# Altium PCB ADSTM32-PCB.PcbDoc
Units mm, origin at the board's own origin, x right, y up, seen from the top; angles counter-clockwise.
Board outline 38.99 x 25.31 mm, 2 copper layers (Top Layer, Bottom Layer), stack 1.671 mm thick; 30 components, 26 nets, 139 pads, 113 vias.
Unrouted connection lines stored in the file: 6.
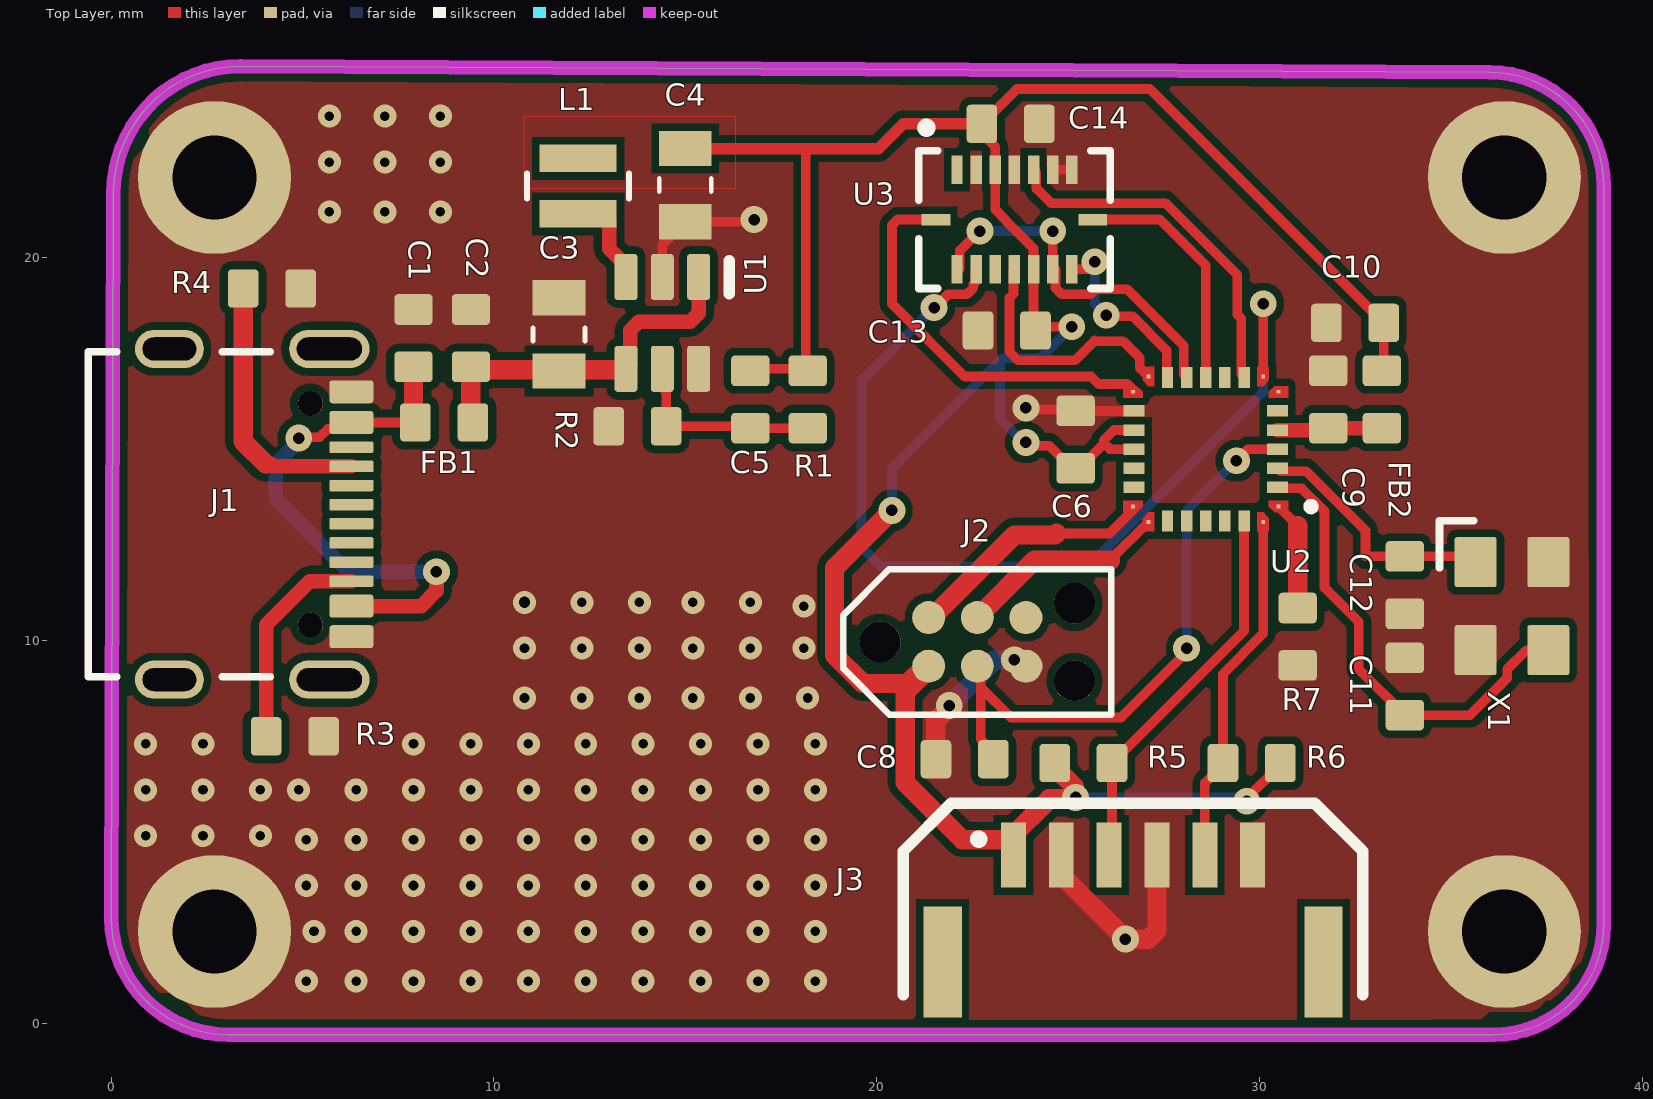
[diagram p0: Top Layer view]
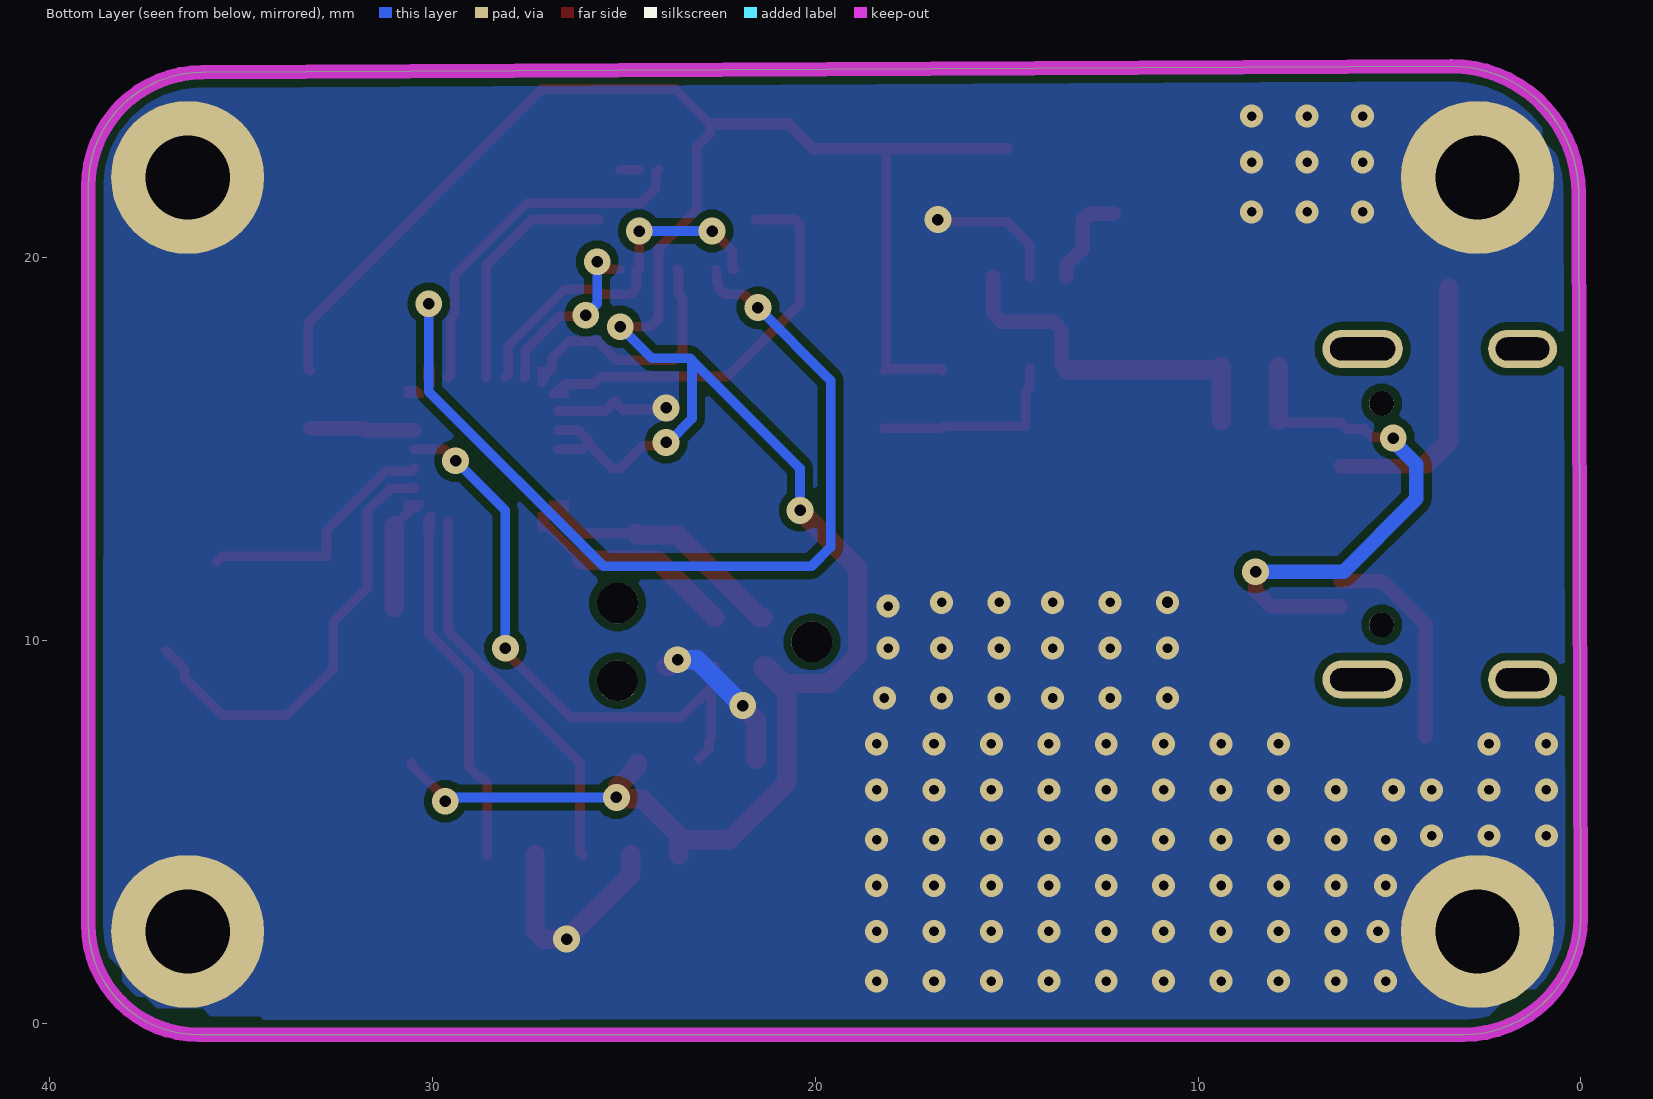
[diagram p1: Bottom Layer view, seen from below]
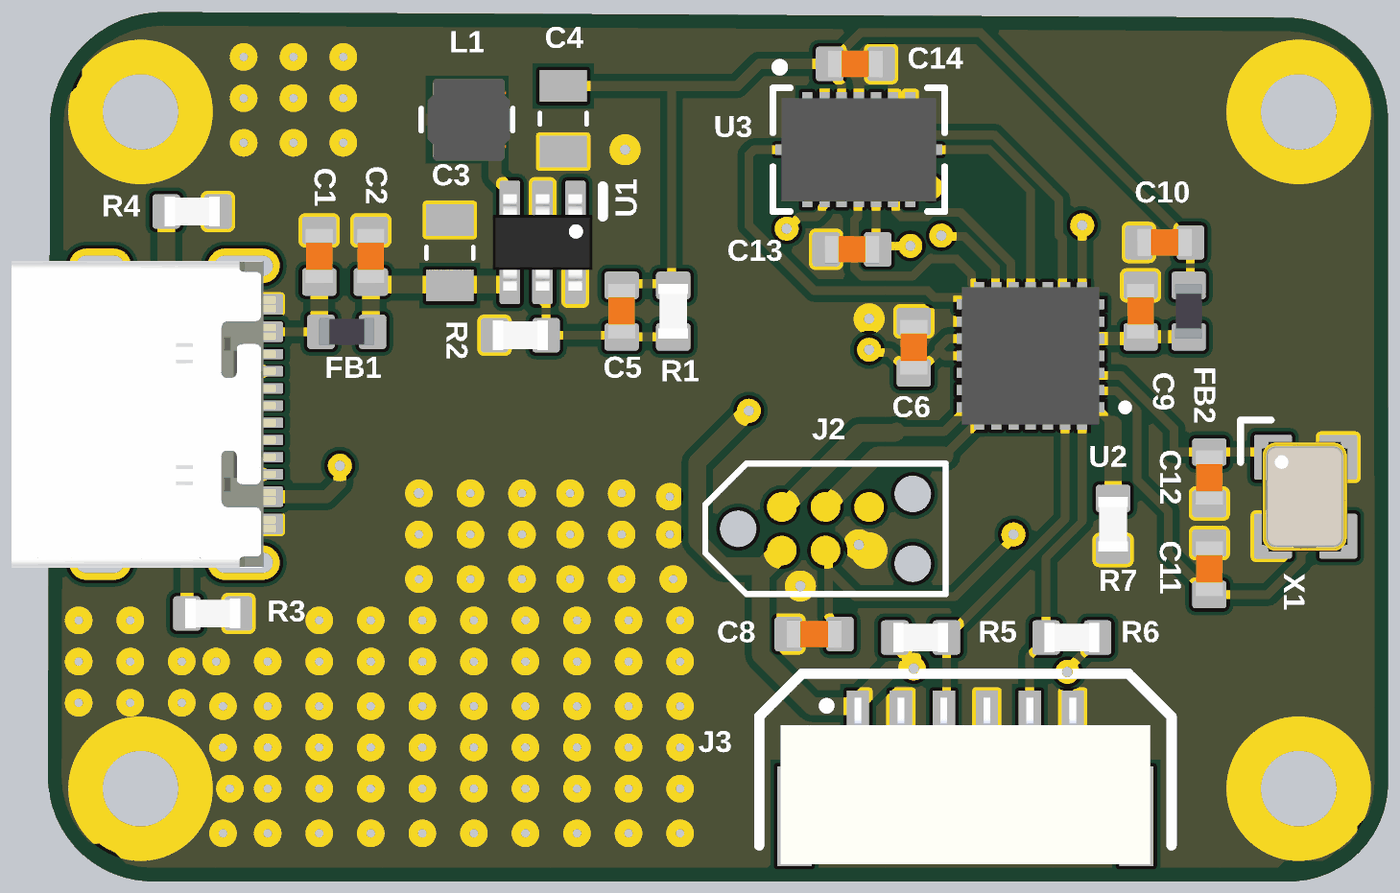
[diagram p2: 3D render of the assembled board from above, using the file's embedded part models]

## Layer stack, top to bottom
Top Solder: solder mask 0.0102, Solder Resist, Dk 3.5
Top Layer: signal copper 0.0356
Dielectric 1: dielectric 1.6, FR-4, Dk 4.6
Bottom Layer: signal copper 0.0356
Bottom Solder: solder mask 0.0102, Solder Resist, Dk 3.5

## Board outline
0.005,2.762 ccw(c3.066,2.762) 3.066,-0.298 26.7,-0.3 36.117,-0.3 ccw(c36.117,2.583) 39,2.583 38.997,21.868 ccw(c36.019,21.868) 36.019,24.846 3.384,25.007 ccw(c3.384,21.682) 0.059,21.682

## Design rules (kind name [scope] priority, off if disabled: settings)
Clearance [All] p1: gap=0.2 ignorepadtopadclearanceinfootprint=FALSE except(0: Arc-Hole Track-Hole SMDPad-Hole THPad-Hole Via-Hole Fill-Hole Poly-Hole Region-Hole Text-Hole; 0.15: Arc-Arc Arc-Track Arc-SMDPad Track-Track Track-SMDPad SMDPad-SMDPad SMDPad-THPad; 0.3: Arc-THPad Track-THPad THPad-THPad)
PolygonConnect [All] p1: connectstyle=Direct reliefconductorwidth=0.254 reliefentries=4 polygonreliefangle="90 Angle" airgapwidth=0.254
RoutingVias [All] p1: holewidth=0.3 width=0.7 viastyle="Through Hole" minholewidth=0.25 minwidth=0.6 maxholewidth=0.3 maxwidth=0.7
SolderMaskExpansion [All] p1: expansion=0.102 istentingtop=FALSE
UnRoutedNet [All] p1: checkbadconnections=TRUE
Width [All] p1: maxlimit=1 minlimit=0.15 preferedwidth=0.3
29 further rules are at their usual default settings.

## Classes and differential pairs
component class U_3_ADSTM32-Peripheral: C13 C14 J3 U3
component class U_2_ADSTM32-MCU: C6 C8 C9 C10 C11 C12 FB2 J2 R5 R6 R7 U2 X1
component class U_1_ADSTM32-Power: C1 C2 C3 C4 C5 FB1 J1 L1 R1 R2 R3 R4 U1

## Components (designator, comment, footprint, x,y, rotation, side; value= is the part's Value field where it differs from the comment)
C1 "100nF" CAP_0603 7.9,17.9 r270 top
C2 "100nF" CAP_0603 9.4,17.9 r270 top
C3 "4u7" C2012X7R1C475K125AE 11.7,18 r90 top
C4 "4u7" C2012X7R1C475K125AE 15,21.9 r270 top
C5 "22pF" CAP_0603 16.7,16.3 r90 top
C6 "100nF" CAP_0603 25.2,15.25 r270 top
C8 "100nF" CAP_0603 22.3,6.9 r180 top
C9 "100nF" CAP_0603 31.8,16.3 r270 top
C10 "100nF" CAP_0603 32.5,18.3 r0 top
C11 "10pF" CAP_0603 33.8,8.8 r270 top
C12 "10pF" CAP_0603 33.8,11.45 r90 top
C13 "100nF" CAP_0603 23.4,18.1 r0 top
C14 "100nF" CAP_0603 23.5,23.5 r180 top
FB1 "120R" FB_0603 8.7,15.7 r0 top
FB2 "120R" FB_0603 33.2,16.3 r90 top
J1 "USB4105-GF-A-060" USB4105-GF-A-060 3.9,13.3 r270 top
J2 "TC2030-NL" TC2030-NL-FP 22.63,9.965 r0 top
J3 "SM06B-GHS-TB" SM06B-GHS-TB 26.7,3 r0 top
L1 "NRH2412T100MNGH" NRH2412T100MNGH 12.2,21.875 r270 top
R1 "887k" RES_0603 18.2,16.3 r90 top
R2 "280k" RES_0603 13.75,15.6 r0 top
R3 "5k1" RES_0603 4.8,7.5 r180 top
R4 "5k1" RES_0603 4.2,19.2 r180 top
R5 "5k1" RES_0603 25.4,6.8 r180 top
R6 "5k1" RES_0603 29.8,6.8 r0 top
R7 "5k1" RES_0603 31,10.1 r90 top
U1 "LTC3405ES6#TRMPBF" SOT-23-6 14.4,18.3 r180 top
U2 "STM32F042G6U6" STM32F042G6U6 28.6,15 r180 top
U3 "BMI088" BMI088 23.6,21 r0 top
X1 "24MHz" XTAL_3225 36.6,10.9 r270 top

## Footprints (in the part's own frame and the unit in brackets; to place one, negate y for a bottom-side part, rotate by r counter-clockwise, add the part's x,y. Pads: shape width x height; smd on the part's side, far side on the other; paste and mask are expansions set on the pad)
BMI088 [mm]
  rect 0.3x0.75 smd: 1(-1.5,1.3) 2(-1,1.3) 3(-0.5,1.3) 4(0,1.3) 5(0.5,1.3) 6(1,1.3) 7(1.5,1.3) 9(1.5,-1.3) 10(1,-1.3) 11(0.5,-1.3) 12(0,-1.3) 13(-0.5,-1.3) 14(-1,-1.3) 15(-1.5,-1.3)
  rect 0.75x0.3 smd: 8(2.05,0) 16(-2.05,0)
  silkscreen extent -2.5,-1.8 2.5,2.51, body extent -2.25,-1.5 2.25,1.5, height 1.01
C2012X7R1C475K125AE [mm]
  rect 0.92x1.38 smd: 1(-0.955,0) 2(0.955,0)
  silkscreen extent -0.17,-0.68 0.17,0.68
CAP_0603 [mm]
  rrect25% 0.8x1 smd: 1(-0.75,0) 2(0.75,0)
  body extent -0.8,-0.4 0.8,0.4, height 0.51
FB_0603 [mm]
  rrect25% 0.8x1 smd: 1(-0.75,0) 2(0.75,0)
  body extent -0.8,-0.4 0.8,0.4, height 0.81
NRH2412T100MNGH [mil]
  rect 28x79 smd paste+0 mask+0: 1(-28.54,0) 2(28.54,0)
  silkscreen extent -13,-52 13,52, body extent -47,-45 47,49, height 47
RES_0603 [mm]
  rrect25% 0.8x1 smd: 1(-0.75,0) 2(0.75,0)
  body extent -0.8,-0.43 0.8,0.43, height 0.52
SM06B-GHS-TB [mm]
  rect 0.65x1.7 smd: 1(-3.125,1.4) 2(-1.875,1.4) 3(-0.625,1.4) 4(0.625,1.4) 5(1.875,1.4) 6(3.125,1.4)
  rect 1x2.9 smd: ""(-4.975,-1.4) ""(4.975,-1.4)
  silkscreen extent -6,-2.25 6,2.75, body extent -5.38,-2.8 5.38,2.05, height 4.26
SOT-23-6 [mm]
  rrect25% 0.6x1.2 smd: 1(-0.95,-1.2) 2(0,-1.2) 3(0.95,-1.2) 4(0.95,1.2) 5(0,1.2) 6(-0.95,1.2)
  silkscreen extent -1.75,-1.63 -1.75,-0.76, body extent -1.45,-1.4 1.45,1.4, height 1.45
STM32F042G6U6 [mm]
  rect 0.1x0.1 smd paste-1 mask+0: 1(-1.9,1.5) 7(-1.9,-1.5) 8(-1.5,-1.9) 14(1.5,-1.9) 15(1.9,-1.5) 21(1.9,1.5) 22(1.5,1.9) 28(-1.5,1.9)
  rect 0.55x0.3 smd: 2(-1.875,1) 3(-1.875,0.5) 4(-1.875,0) 5(-1.875,-0.5) 6(-1.875,-1) 16(1.875,-1) 17(1.875,-0.5) 18(1.875,0) 19(1.875,0.5) 20(1.875,1)
  rect 0.3x0.55 smd: 9(-1,-1.875) 10(-0.5,-1.875) 11(0,-1.875) 12(0.5,-1.875) 13(1,-1.875) 23(1,1.875) 24(0.5,1.875) 25(0,1.875) 26(-0.5,1.875) 27(-1,1.875)
  Top Layer region: -1.35,1.65 -1.5,1.65 -1.65,1.8 -1.65,2.15 -1.35,2.15
  Top Layer region: 1.65,1.8 1.5,1.65 1.35,1.65 1.35,2.15 1.65,2.15
  Top Layer region: 2.15,1.35 1.65,1.35 1.65,1.5 1.8,1.65 2.15,1.65
  Top Layer region: 2.15,-1.65 1.8,-1.65 1.65,-1.5 1.65,-1.35 2.15,-1.35
  Top Layer region: 1.65,-1.8 1.65,-2.15 1.35,-2.15 1.35,-1.65 1.5,-1.65
  Top Layer region: -1.35,-2.15 -1.65,-2.15 -1.65,-1.8 -1.5,-1.65 -1.35,-1.65
  Top Layer region: -1.65,-1.5 -1.8,-1.65 -2.15,-1.65 -2.15,-1.35 -1.65,-1.35
  Top Layer region: -1.65,1.5 -1.65,1.35 -2.15,1.35 -2.15,1.65 -1.8,1.65
  silkscreen extent -2.85,1.4 -2.65,1.6, body extent -2,-2 2,2, height 0.6
TC2030-NL-FP [mil]
  round 33.98 smd paste-16.99: 1(-50,-25) 2(-50,25) 3(0,-25) 4(0,25) 5(50,-25) 6(50,25)
  round 42.01 hole 42.01 unplated: MH(-100,0) MH(100,-40) MH(100,40)
  silkscreen extent -138,-75 138,75
USB4105-GF-A-060 [mm]
  rrect25% 0.6x1.15 smd mask+0.05: A1B12(-3.2,2.378) A4B9(-2.4,2.378) B1A12(3.2,2.378) B4A9(2.4,2.378)
  rrect25% 0.3x1.15 smd mask+0.05: A5(-1.25,2.378) A6(-0.25,2.378) A7(0.25,2.378) A8(1.25,2.378) B5(1.75,2.378) B6(0.75,2.378) B7(-0.75,2.378) B8(-1.75,2.378)
  round 0.65 hole 0.65 unplated mask+0.05: MH(-2.89,1.303) MH(2.89,1.303)
  oval 1x2.1 hole 0.6 slot 1.7 at 90 deg: SH(-4.32,1.803) SH(4.32,1.803)
  oval 1x1.8 hole 0.6 slot 1.4 at 90 deg: SH(-4.32,-2.377) SH(4.32,-2.377)
  silkscreen extent -4.25,-4.5 4.25,0.25, body extent -4.47,-4.97 4.47,2.73, height 3.27
XTAL_3225 [mm]
  rrect10% 1.3x1.1 smd: 1(-1.15,-0.95) 2(1.15,-0.95) 3(1.15,0.95) 4(-1.15,0.95)
  silkscreen extent -2.23,-1.89 -1,-1, body extent -1.6,-1.28 1.6,1.22, height 0.61

## Part data
C1 C2 C5 C6 C8 C9 C10 C11 C12 C13 C14: library part CAP_0603, "Capacitor SMD 0603"
C3 C4: library part CAP_0805_16V, "Multilayer Ceramic Capacitors MLCC - SMD/SMT 0805 16VDC 4.7uF 10% X7R 1.25mm", Manufacturer=TDK, Manufacturer Part Number=C2012X7R1C475K125AE
FB1 FB2: library part FB_0603, "Ferrite Bead SMD 0603"
J1: "USB Connector Type C SMT 12 Pin", Manufacturer=GCT, Distributor Link=https://eu.mouser.com/ProductDetail/GCT/USB4105-GF-A-060?qs=QNEnbhJQKvY2mocwNJzgfA%3D%3D, Manufacturer Part Number=USB4105-GF-A-060
J2: "Tag-Connect No-Solder SWD Debug Connector (No Legs) DO NOT PLACE", Manufacturer=Tag-Connect, Manufacturer Part Number=TC2030-NL-FP
J3: "Header Connector 6 Position 1.25MM Pitch SMD Horizontal JST GH", Manufacturer=JST, Manufacturer Part Number=SM06B-GHS-TB
L1: "Power Inductors - SMD 963-LSXNE2424MKT100M RPLCMT PN 2412 10uH 600mOhms", Manufacturer="TAIYO YUDEN", Manufacturer Part Number=NRH2412T100MNGH
R1 R2 R3 R4 R5 R6 R7: library part RES_0603, "Resistor SMD 0603"
U1: "Switching Voltage Regulators 1.5MHz, 300mA Sync Buck Reg in SOT", Manufacturer="Analog Devices", Manufacturer Part Number=LTC3405ES6#TRMPBF
U2: "ARM® Cortex®-M0 STM32F0 Microcontroller IC 32-Bit Single-Core 48MHz 32KB (32K x 8) FLASH 28-UFQFPN (4x4)", Manufacturer=STMicroelectronics, Manufacturer Part Number=STM32F042G6U6
U3: "Inertial Measurement Unit IMU 6-Axis LGA", Manufacturer=Bosch, Manufacturer Part Number=BMI088
X1: library part TSX-3225_24.0000MF15X-AC, "Crystal SMD 24MHz 10PPM 7pF 3225", Manufacturer=Epson, Manufacturer Part Number="TSX-3225 24.0000MF15X-AC"

## Free pads (board coordinates)
  round 4 hole 2.2: MH(2.7,2.4) MH(2.7,22.1) MH(36.4,2.4) MH(36.4,22.1)

## Via types
v1: diameter 0.6, hole 0.25, Top Layer to Bottom Layer, 92 vias
v2: diameter 0.7, hole 0.3, Top Layer to Bottom Layer, 20 vias
v3: diameter 0.6, hole 0.3, Top Layer to Bottom Layer, 1 vias

## Nets (pads, with @x,y where several pads share a name; then routed paths per layer and width w, separated by ;. In a path a pad name is that pad's centre, name@x,y a point inside that pad or via, vN(x,y) a via of type N, cw(c..) or ccw(c..) an arc to the next point about the centre after c; other vN are vias at no path point)
+3V3: C4.1 C5.2 C6.2 C10.2 C13.2 C14.2 FB2.2 J2.1 J3.1 L1.1 R1.2 R5.2 R6.2 U2.17 U2.18 U3.3 U3.11 | length 74.7
  Top Layer w0.254: C5.2 16.7,17.1 R1.2@18.15,17.1 ; 18.1,22.855 18.15,22.805 R1.2@18.15,17.1 ; R1.2 R1.2@18.15,17.1 ; v2(23.9,15.177) 23.985,15.092 24.508,15.092 25.1,14.5 C6.2 25.3,14.5 25.932,15.132 25.932,15.168 ; C13.2@24.15,18.4 C13.2@24.1,18.4 ; v2(25.1,18.2) 24.3,18.2 C13.2@24.1,18.4 ; U2.18 26.1,15 25.932,15.168 ; U2.17 26.2,15.5 25.932,15.232 25.932,15.168 ; v2(29.669,5.8) 29.669,5.869 30.55,6.75 R6.2 ; FB2.2 33.25,17.1 C10.2 27.137,24.413 23.663,24.413 C14.2 22.75,23.25 23.1,22.9 U3.3 23.1,21.257 23.377,20.98 23.377,20.966 24.1,20.243 U3.11 C13.2@24.1,18.4
  Top Layer w0.3: C4.1 18.1,22.855 20.055,22.855 20.7,23.5 C14.2
  Top Layer w0.508: v2(20.4,13.4) 18.9,11.9 18.9,9.617 19.64,8.877 20.811,8.877 21.264,9.33 J2.1 21.36,9.26 20.746,8.646 20.746,6.291 22.237,4.8 J3.1@23.504,4.8 ; J3.1 23.575,4.729 J3.1@23.504,4.8 ; R5.2 24.65,6.7 25.163,6.187 25.163,5.937 v2(25.2,5.9) 25.163,5.863 24.513,5.863 23.504,4.854 J3.1@23.504,4.8
  Bottom Layer w0.254: v2(20.4,13.4) 20.4,14.5 23.223,17.323 ; v2(23.9,15.177) 23.843,15.177 23.223,15.797 23.223,17.323 ; v2(25.1,18.2) 24.277,17.377 23.277,17.377 23.223,17.323 ; v2(25.2,5.9) 29.569,5.9 v2(29.669,5.8)
+3V3A: C9.2 FB2.1 U2.5 | length 2.7
  Top Layer w0.381: U2.5 31.75,15.5 C9.2 FB2.1
+5: C2.2 C3.1 FB1.2 U1.1 U1.4 | length 9.5
  Top Layer w0.381: FB1.2@9.4,15.75 FB1.2 ; C2.2 C2.2@9.478,17.072 ; U1.4@13.422,17.072 13.559,17.209 13.559,18.111 13.783,18.334 15.127,18.334 15.35,18.557 U1.1
  Top Layer w0.508: FB1.2@9.4,15.75 C2.2 ; C2.2@9.478,17.072 U1.4@13.422,17.072
+VUSB: C1.2 FB1.1 J1.A4B9 J1.B4A9 | length 14.4
  Top Layer w0.254: v2(4.9,15.29) 4.922,15.312 5.445,15.312 5.66,15.527 6.105,15.527 J1.A4B9 FB1.1 FB1.1@7.9,15.75
  Top Layer w0.381: J1.B4A9 8.1,10.9 8.5,11.3 v2(8.5,11.8)
  Top Layer w0.508: FB1.1@7.9,15.75 C1.2
  Bottom Layer w0.381: v2(4.9,15.29) 4.9,15.204 4.3,14.604 4.3,13.7 6.2,11.8 v2(8.5,11.8)
BOOT0: R7.2 U2.1 | length 2.9
  Top Layer w0.254: U2.1 31,13
  Top Layer w0.508: R7.2 31,13
BUCK_SW: L1.2 U1.3 | length 2.5
  Top Layer w0.381: L1.2 12.848,21.15 13.013,20.985 13.013,20.237 13.45,19.8 U1.3
BUCK_VFB: C5.1 R1.1 R2.2 U1.5 | length 5.3
  Top Layer w0.254: U1.5 14.4,16.6 14.5,16.5 R2.2 16.65,15.6 C5.1 R1.1
GND: C1.1 C2.1 C3.2 C4.2 C6.1 C8.2 C9.1 C10.1 C11.1 C12.1 C13.1 C14.1 J1.A1B12 J1.B1A12 J2.5 J3.2 J3.4 J3.6 pad.MH R2.1 R3.1 R4.1 R7.1 U1.2 U1.6 U2.16 U3.2 U3.4 U3.6 U3.7 X1.2 X1.4 | length 17
  Top Layer w0.254: U1.2 14.4,20.345 C4.2 16.745,20.945 v2(16.8,21) ; v2(23.9,16.077) 23.939,16.038 24.957,16.038 24.995,16 25.248,16.252 25.5,16 U2.16 ; U3.6 U3.7
  Top Layer w0.508: C8.2 21.55,7.914 21.9,8.264 v2(21.9,8.3) ; v2(23.6,9.5) 23.652,9.5 23.822,9.33 J2.5 ; J3.2 24.825,3.875 v2(26.5,2.2) 27.1,2.2 27.325,2.425 J3.4
  Bottom Layer w0.508: v2(21.9,8.3) 23.1,9.5 v2(23.6,9.5)
  other v1: 5.1,1.1 6.4,1.1 7.9,1.1 9.4,1.1 10.9,1.1 12.4,1.1 13.9,1.1 15.4,1.1 16.9,1.1 18.4,1.1 5.3,2.4 6.4,2.4 7.9,2.4 9.4,2.4 10.9,2.4 12.4,2.4 13.9,2.4 15.4,2.4 16.9,2.4 18.4,2.4 5.1,3.6 6.4,3.6 7.9,3.6 9.4,3.6 10.9,3.6 12.4,3.6 13.9,3.6 15.4,3.6 16.9,3.6 18.4,3.6 5.1,4.8 6.4,4.8 7.9,4.8 9.4,4.8 10.9,4.8 12.4,4.8 13.9,4.8 15.4,4.8 16.9,4.8 18.4,4.8 0.9,4.9 2.4,4.9 3.9,4.9 0.9,6.1 2.4,6.1 3.9,6.1 4.9,6.1 6.4,6.1 7.9,6.1 9.4,6.1 10.9,6.1 12.4,6.1 13.9,6.1 15.4,6.1 16.9,6.1 18.4,6.1 0.9,7.3 2.4,7.3 7.9,7.3 9.4,7.3 10.9,7.3 12.4,7.3 13.9,7.3 15.4,7.3 16.9,7.3 18.4,7.3 10.8,8.5 12.3,8.5 13.8,8.5 15.2,8.5 16.7,8.5 18.2,8.5 10.8,9.8 12.3,9.8 13.8,9.8 15.2,9.8 16.7,9.8 18.1,9.8 18.1,10.9 12.3,11 13.8,11 15.2,11 16.7,11 5.7,21.2 7.15,21.2 8.6,21.2 5.7,22.5 7.15,22.5 8.6,22.5 5.7,23.7 7.15,23.7 8.6,23.7
  other v3: 10.8,11
I2C_SCL: J3.3 R5.1 U2.27 | length 10.2
  Top Layer w0.254: J3.3 26.15,4.475 R5.1 29.6,10.25 U2.27
I2C_SDA: J3.5 R6.1 U2.28 | length 9.4
  Top Layer w0.254: J3.5 28.575,6.278 28.724,6.427 28.777,6.427 29.05,6.7 29.05,9.129 30.1,10.179 U2.28
IMU_INT1: U2.15 U3.16 | length 10.5
  Top Layer w0.254: U3.16 20.549,21 20.4,20.851 20.4,18.8 22.3,16.9 25.603,16.9 25.802,16.702 26.551,16.702 26.7,16.553 U2.15
IMU_INT2: U2.14 U3.12 | length 6.7
  Top Layer w0.254: U3.12 23.577,19.677 23.577,19.06 23.473,18.956 23.473,17.544 23.694,17.323 25.18,17.323 25.7,17.843 25.72,17.823 26.434,17.823 26.877,17.38 26.877,17.123 U2.14
IMU_MISO: U2.12 U3.10 U3.15 | length 9.7
  Top Layer w0.254: U3.15 22.173,19.7 22.173,20.19 22.683,20.7 v2(22.7,20.7) ; v2(24.6,20.7) U3.10 24.673,19.7 24.673,19.21 24.835,19.048 25.591,19.048 25.72,19.177 26.552,19.177 28.027,17.702 28.027,16.948 U2.12
  Bottom Layer w0.254: v2(22.7,20.7) v2(24.6,20.7)
IMU_MOSI: U2.13 U3.9 | length 4.9
  Top Layer w0.254: U3.9 25.5,19.7 v2(25.7,19.9) ; v2(26,18.5) 26.025,18.475 26.682,18.475 27.577,17.58 27.577,16.898 U2.13
  Bottom Layer w0.254: v2(25.7,19.9) 25.7,18.8 v2(26,18.5)
IMU_NCS_ACC: U2.8 U3.14 | length 25.6
  Top Layer w0.254: v2(21.5,18.7) 21.524,18.7 21.872,19.048 22.365,19.048 22.527,19.21 22.527,19.303 22.577,19.353 22.577,19.677 U3.14 ; U2.8 v2(30.1,18.8)
  Bottom Layer w0.254: v2(21.5,18.7) 19.6,16.8 19.6,12.443 20.101,11.942 25.542,11.942 30.1,16.5 v2(30.1,18.8)
IMU_NCS_GYR: U2.9 U3.5 | length 9.5
  Top Layer w0.254: U3.5 24.173,22.227 24.173,21.81 24.556,21.427 27.544,21.427 29.423,19.548 29.423,18.52 29.527,18.416 29.527,16.948 U2.9
IMU_SCK: U2.11 U3.8 | length 6.4
  Top Layer w0.254: U3.8 27.4,21 28.6,19.8 U2.11
NRST: C8.1 J2.3 U2.4 | length 15.8
  Top Layer w0.254: J2.3 22.721,9.239 22.721,8.779 ; C8.1 22.777,7.173 22.777,7.365 22.721,7.422 22.721,8.779 ; v2(28.1,9.8) 28.1,9.7 26.388,7.988 23.512,7.988 22.721,8.779 ; v2(29.4,14.7) 29.7,15 U2.4
  Bottom Layer w0.254: v2(28.1,9.8) 28.1,13.4 v2(29.4,14.7)
OSC_IN: C11.2 U2.2 X1.3 | length 11.7
  Top Layer w0.254: U2.2 30.475,13.977 31.103,13.977 31.7,13.38 31.7,11.383 32.6,10.483 32.6,9.25 C11.2 35.51,8.05 36.477,9.017 36.477,9.252 36.975,9.75
OSC_OUT: C12.2 U2.3 X1.1 | length 6.6
  Top Layer w0.254: U2.3 30.548,14.427 31.224,14.427 32.775,12.876 32.775,12.204 32.779,12.2 C12.2 35.5,12.2 X1.1
SWCLK: J2.4 U2.22 | length 5.5
  Top Layer w0.254: 26.1,12.1 U2.22
  Top Layer w0.508: J2.4 24.13,12.1 26.1,12.1
SWDIO: J2.2 U2.21 | length 6.6
  Top Layer w0.254: 24.7,12.8 26.088,12.8 26.768,13.48
  Top Layer w0.508: J2.2 21.448,10.6 23.606,12.758 24.658,12.758 24.7,12.8
USB_CC1: J1.A5 R4.2 | length 7.1
  Top Layer w0.381: 4.039,14.613 4.166,14.613 4.23,14.55 J1.A5
  Top Layer w0.508: R4.2 3.45,15.203 4.039,14.613
USB_CC2: J1.B5 R3.2 | length 5.6
  Top Layer w0.381: R3.2 4.05,10.411 5.189,11.55 J1.B5
USB_DN: J1.A7 J1.B7 U2.19
USB_DP: J1.A6 J1.B6 U2.20
pads on no net: J1.A8 J1.B8 J1.MH J1.SH J2.6 J2.MH J3. U2.6 U2.7 U2.10 U2.23 U2.24 U2.25 U2.26 U3.1 U3.13

## Polygon pours and split planes (outlines as drawn)
+3V3 on Top Layer "+3V3_L01_P004" (solid, remove dead copper, pour order 4): 10.8,23.7 16.3,23.7 16.3,21.8 10.8,21.8
GND on Top Layer "GND_L01_P000" (solid, remove dead copper, pour order 0): 1.1,23.9 1.4,24.2 1.5,24.2 1.9,24.6 2.2,24.6 2.4,24.8 3,24.8 3.1,24.9 3.6,24.9 3.7,24.8 4.5,24.8 4.7,24.6 36.5,24.6 36.6,24.5 37.2,24.5 37.4,24.3 37.4,24.2 37.5,24.1 37.8,24.1 37.9,24 37.9,23.9 38.4,23.4 38.4,23.2 38.5,23.1 38.5,22.8 38.6,22.7 38.6,22.3 38.9,22 38.8,21.9 38.8,21.2 38.7,21.1 38.7,2.6 38.6,2.5 38.6,1.8 38.1,1.3 38.1,0.9 37.8,0.6 37.5,0.6 37.2,0.3 36,0.3 35.8,0.1 34.5,0.1 34.4,0 2.5,0 1.7,0.8 0.8,0.8 0.4,1.2 0.4,4.7 0.3,4.8 0.3,6.7 0.4,6.8 0.4,22.4 1,23 1,23.9
GND on Bottom Layer "GND_L02_P001" (solid, remove dead copper, pour order 1): 1.11,23.987 1.41,24.287 1.51,24.287 1.91,24.687 2.21,24.687 2.41,24.887 3.01,24.887 3.11,24.987 3.61,24.987 3.71,24.887 4.51,24.887 4.71,24.687 36.51,24.687 36.61,24.587 37.21,24.587 37.41,24.387 37.41,24.287 37.51,24.187 37.81,24.187 37.91,24.087 37.91,23.987 38.41,23.487 38.41,23.287 38.51,23.187 38.51,22.887 38.61,22.787 38.61,22.387 38.91,22.087 38.81,21.987 38.81,21.287 38.71,21.187 38.71,2.687 38.61,2.587 38.61,1.887 38.11,1.387 38.11,0.987 37.81,0.687 37.51,0.687 37.21,0.387 36.01,0.387 35.81,0.187 34.51,0.187 34.41,0.087 2.51,0.087 1.71,0.887 0.81,0.887 0.41,1.287 0.41,4.787 0.31,4.887 0.31,6.787 0.41,6.887 0.41,22.487 1.01,23.087 1.01,23.987

## Keep-outs
Keep-Out Layer:
  the board outline again, w0.381

## Text inside footprints (layer, text, board x,y; h text height)
L1: Mechanical 13 "*" at 10.93,22.891 h1.27 r270